# Altium PCB MYPCBeta.PcbDoc
Units mil, origin at the board's own origin, x right, y up, seen from the top; angles counter-clockwise.
Board outline 6000 x 4000 mil, 2 copper layers (Top Layer, Bottom Layer); 56 components, 75 nets, 228 pads, 33 vias.
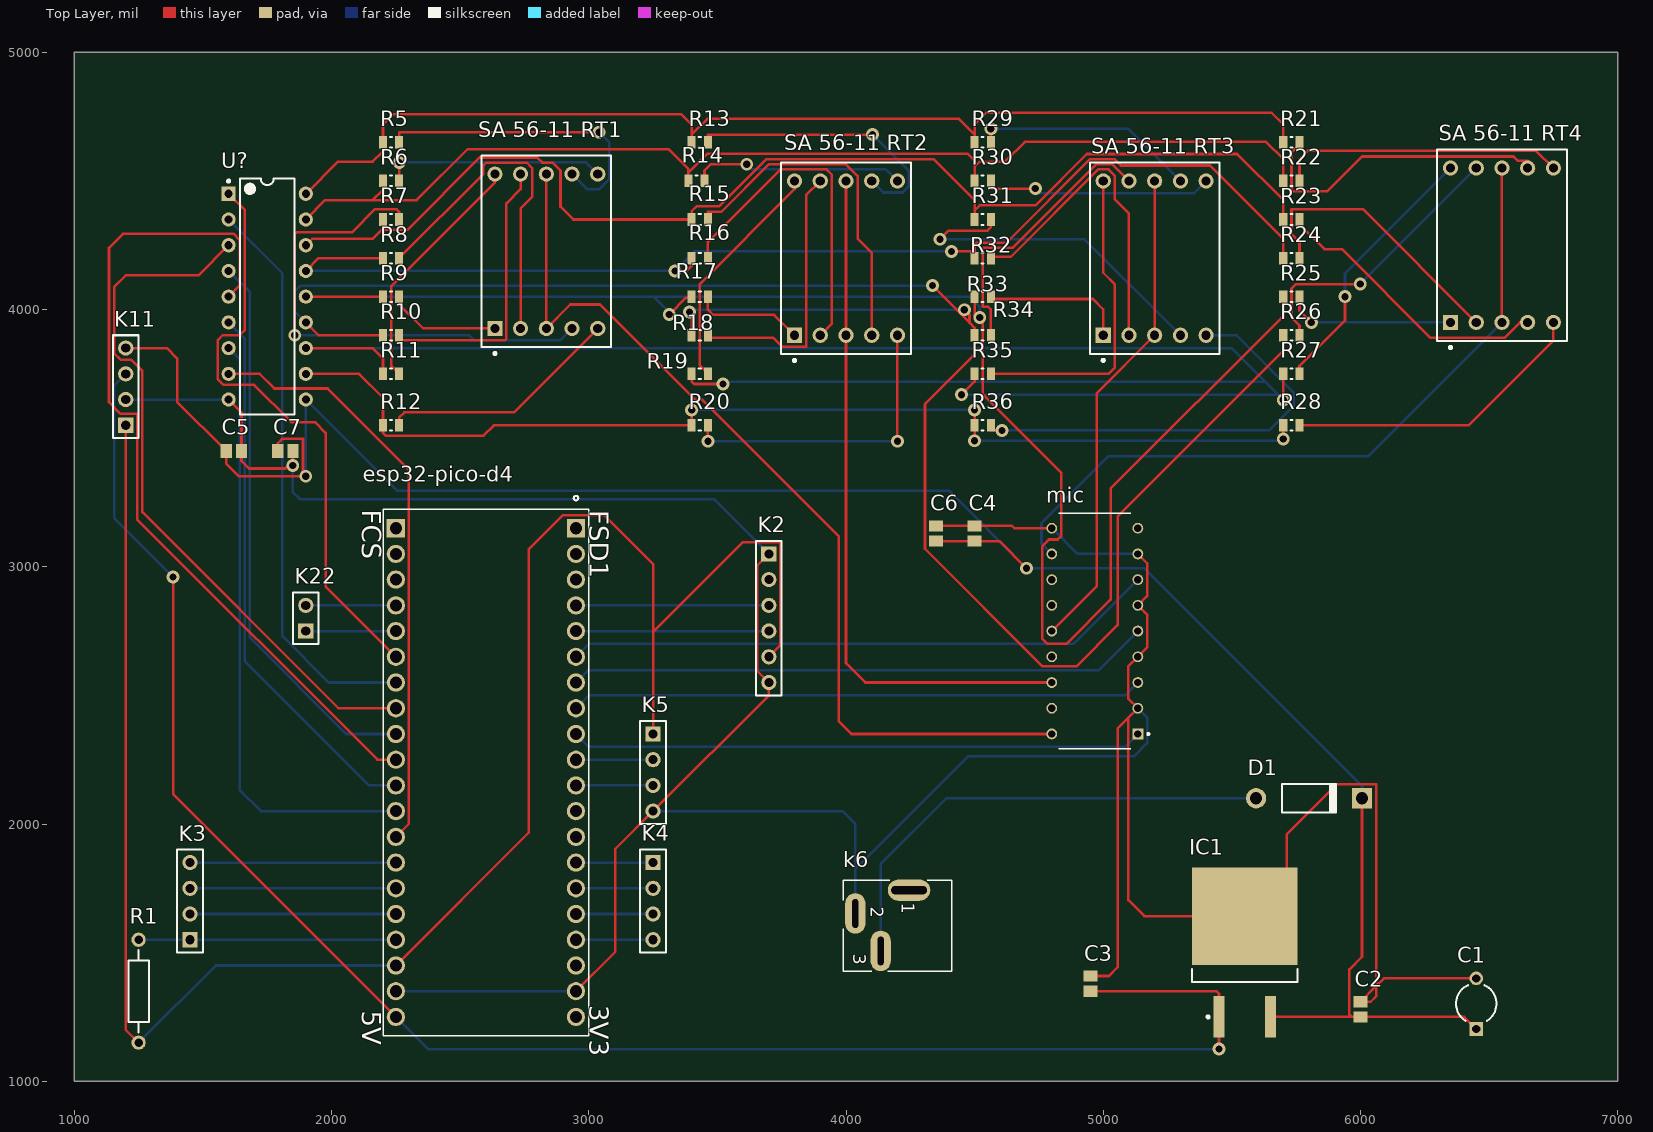
[diagram p0: Top Layer view]
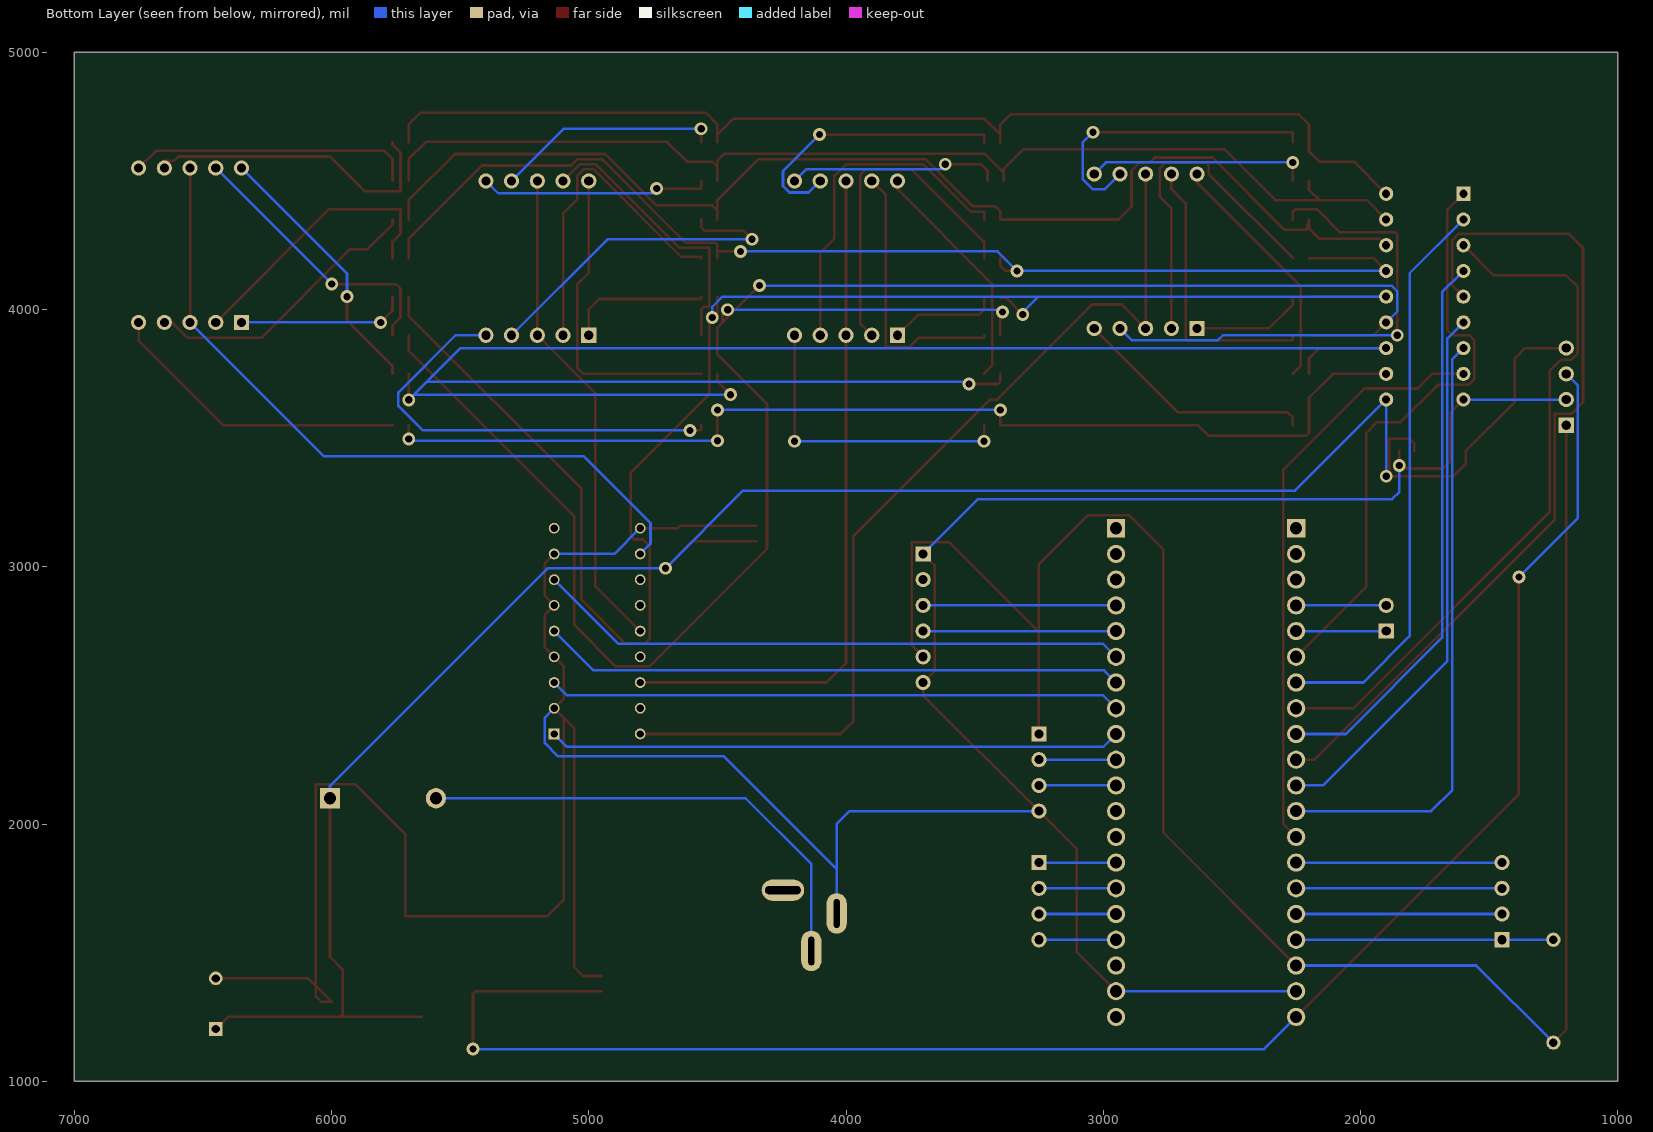
[diagram p1: Bottom Layer view, seen from below]

## Layer stack, top to bottom
Top Solder: solder mask 0.4, Solder Resist, Dk 3.5
Top Layer: signal copper 1.4
Dielectric 1: dielectric 12.6, FR-4, Dk 4.8
Bottom Layer: signal copper 1.4
Bottom Solder: solder mask 0.4, Solder Resist, Dk 3.5

## Board outline
1000,1000 7000,1000 7000,5000 1000,5000

## Design rules (kind name [scope] priority, off if disabled: settings)
Clearance [All] p1: gap=10 ignorepadtopadclearanceinfootprint=FALSE except(0: Arc-Hole Track-Hole SMDPad-Hole THPad-Hole Via-Hole Fill-Hole Poly-Hole Region-Hole Text-Hole)
PolygonConnect [All] p1: connectstyle=Relief reliefconductorwidth=10 reliefentries=4 polygonreliefangle="90 Angle" airgapwidth=10
RoutingVias [All] p1: holewidth=28 width=50 viastyle="Through Hole" minholewidth=28 minwidth=50 maxholewidth=28 maxwidth=50
SilkToSolderMaskClearance [IsPad] p1 off: minsilkscreentomaskgap=10 clearancetoexposedcopper=TRUE
SolderMaskExpansion [All] p1: expansion=4 istentingtop=FALSE
Width [All] p1: maxlimit=10 minlimit=10 preferedwidth=10
29 further rules are at their usual default settings.

## Components (designator, comment, footprint, x,y, rotation, side; value= is the part's Value field where it differs from the comment)
C1 "Cap Pol1" CAPR5-4X5 6450,1301.57 r90 top value=100μF
C2 "Cap Pol3" C0805 6000,1279.53 r90 top value=330nF
C3 "Cap Pol3" C0805 4950,1379.53 r90 top value=100nF
C4 "Cap Pol3" C0805 4500,3129.53 r90 top value=1μF
C5 "Cap Pol3" C0805 1620.47,3450 r0 top value=1μ
C6 "Cap Pol3" C0805 4350,3129.53 r90 top value=100nF
C7 "Cap Pol3" C0805 1820.47,3450 r0 top value=100nF
D1 "Diode" DO-41 5800,2100 r0 top
esp32-pico-d4 "esp32-pico-d4" esp32picod4 2580,2205 r270 top
IC1 "L7805CD2T-TR" TO-263_M 5550,1500 r90 top
K2 "Header 6" HDR1X6 3700,3050 r270 top
K3 "Header 4" HDR1X4 1450,1550 r90 top
K4 "Header 4" HDR1X4 3250,1850 r270 top
K5 "Header 4" HDR1X4 3250,2350 r270 top
k6 "k6" k6 4200,1600 r270 top
K11 "Header 4" HDR1X4 1200,3550 r90 top
K22 "Header 2" HDR1X2 1900,2750 r90 top
mic "MIC2981" MIC2981 4964.65,2765 r180 top
R1 "Res2" AXIAL-0.4 1250,1350 r90 top value=1K
R5 "Res2" smd43 2231.5,4650 r0 top value=43Ω
R6 "Res2" smd43 2231.5,4500 r0 top value=43Ω
R7 "Res2" smd43 2231.5,4350 r0 top value=43Ω
R8 "Res2" smd43 2231.5,4200 r0 top value=43Ω
R9 "Res2" smd43 2231.5,4050 r0 top value=43Ω
R10 "Res2" smd43 2231.5,3900 r0 top value=43Ω
R11 "Res2" smd43 2231.5,3750 r0 top value=43Ω
R12 "Res2" smd43 2231.5,3550 r0 top value=680Ω
R13 "Res2" smd43 3431.5,4650 r0 top value=43Ω
R14 "Res2" smd43 3418.5,4500 r0 top value=43Ω
R15 "Res2" smd43 3431.5,4350 r0 top value=43Ω
R16 "Res2" smd43 3431.5,4200 r0 top value=43Ω
R17 "Res2" smd43 3431.5,4050 r0 top value=43Ω
R18 "Res2" smd43 3431.5,3900 r0 top value=43Ω
R19 "Res2" smd43 3431.5,3750 r0 top value=43Ω
R20 "Res2" smd43 3431.5,3550 r0 top value=680Ω
R21 "Res2" smd43 5731.5,4650 r0 top value=43Ω
R22 "Res2" smd43 5731.5,4500 r0 top value=43Ω
R23 "Res2" smd43 5731.5,4350 r0 top value=43Ω
R24 "Res2" smd43 5731.5,4200 r0 top value=43Ω
R25 "Res2" smd43 5731.5,4050 r0 top value=43Ω
R26 "Res2" smd43 5731.5,3900 r0 top value=43Ω
R27 "Res2" smd43 5731.5,3750 r0 top value=43Ω
R28 "Res2" smd43 5731.5,3550 r0 top value=680Ω
R29 "Res2" smd43 4531.5,4650 r0 top value=43Ω
R30 "Res2" smd43 4531.5,4500 r0 top value=43Ω
R31 "Res2" smd43 4531.5,4350 r0 top value=43Ω
R32 "Res2" smd43 4531.5,4200 r0 top value=43Ω
R33 "Res2" smd43 4531.5,4050 r0 top value=43Ω
R34 "Res2" smd43 4531.5,3900 r0 top value=43Ω
R35 "Res2" smd43 4531.5,3750 r0 top value=43Ω
R36 "Res2" smd43 4531.5,3550 r0 top value=680Ω
"SA 56-11 RT1" "Dpy Blue-CA" H 2835,4226.5 r0 top
"SA 56-11 RT2" "Dpy Blue-CA" H 4000,4200 r0 top
"SA 56-11 RT3" "Dpy Blue-CA" H 5200,4200 r0 top
"SA 56-11 RT4" "Dpy Blue-CA" H 6550,4250 r0 top
U? "ULN2803A" STM-DIP-18 1750,4050 r0 top

## Footprints (in the part's own frame and the unit in brackets; to place one, negate y for a bottom-side part, rotate by r counter-clockwise, add the part's x,y. Pads: shape width x height; smd on the part's side, far side on the other; paste and mask are expansions set on the pad)
AXIAL-0.4 [mm] "Axial Device, Thru-Hole; 2 Leads; 0.4 in Pin Spacing"
  round 1.4 hole 0.85: 1(-5.08,0) 2(5.08,0)
  silkscreen extent -4.06,-1.02 4.06,1.02
C0805 [mm] "Chip Capacitor, Body 2.0x1.3mm, IPC High Density"
  rect 1.1x1.4 smd: 1(-0.75,0) 2(0.75,0)
  body extent -1.1,-0.72 1.1,0.72, height 1.4
CAPR5-4X5 [mm] "Capacitor; 2 Leads"
  rect 1.35x1.35 hole 0.8: 1(-2.5,0)
  round 1.35 hole 0.8: 2(2.5,0)
  silkscreen extent -1.69,-2 1.82,2
DO-41 [mm] "Diode, Axial; Body 5.2 x 2.7 mm (LxDia. max), Lead Dia. 0.86 mm (max)"
  round 2 hole 1.2: 1(-5.23,0)
  rect 2x2 hole 1.2: 2(5.23,0)
  silkscreen extent -2.65,-1.4 2.75,1.4
esp32picod4 [mm]
  rect 1.8x1.8 hole 1.2: 1(-24.003,-8.382) 40(-24.003,9.398)
  round 1.8 hole 1.2: 2(-21.463,-8.382) 3(-18.923,-8.382) 4(-16.383,-8.382) 5(-13.843,-8.382) 6(-11.303,-8.382) 7(-8.763,-8.382) 8(-6.223,-8.382) 9(-3.683,-8.382) 10(-1.143,-8.382) 11(1.397,-8.382) 12(3.937,-8.382) 13(6.477,-8.382) 14(9.017,-8.382) 15(11.557,-8.382) 16(14.097,-8.382) 17(16.637,-8.382) 18(19.177,-8.382) 19(21.717,-8.382) 20(24.257,-8.382) 21(24.257,9.398) 22(21.717,9.398) 23(19.177,9.398) 24(16.637,9.398) 25(14.097,9.398) 26(11.557,9.398) 27(9.017,9.398) 28(6.477,9.398) 29(3.937,9.398) 30(1.397,9.398) 31(-1.143,9.398) 32(-3.683,9.398) 33(-6.223,9.398) 34(-8.763,9.398) 35(-11.303,9.398) 36(-13.843,9.398) 37(-16.383,9.398) 38(-18.923,9.398) 39(-21.463,9.398)
  silkscreen extent -27.2,-9.64 26.13,10.66
H [mm] "LED, 7-Segment Display, 14.2 mm, RHD; 10 Leads; Row Space 15.24 mm; Pitch 2.54 mm"
  rect 1.5x1.5 hole 0.9: 1(-5.08,-7.62)
  round 1.5 hole 0.9: 2(-2.54,-7.62) 3(0,-7.62) 4(2.54,-7.62) 5(5.08,-7.62) 6(5.08,7.62) 7(2.54,7.62) 8(0,7.62) 9(-2.54,7.62) 10(-5.08,7.62)
  silkscreen extent -6.4,-10.22 6.4,9.45, body extent -6.4,-9.45 6.4,9.45, height 8.25
HDR1X2 [mm] "Connector; Header; 2 Position"
  rect 1.5x1.5 hole 0.9: 1(0,0)
  round 1.5 hole 0.9: 2(2.54,0)
  silkscreen extent -1.27,-1.27 3.81,1.27
HDR1X4 [mm] "Connector; Header; 4 Position"
  rect 1.5x1.5 hole 0.9: 1(0,0)
  round 1.5 hole 0.9: 2(2.54,0) 3(5.08,0) 4(7.62,0)
  silkscreen extent -1.27,-1.27 8.89,1.27
HDR1X6 [mm] "Connector; Header; 6 Position"
  rect 1.5x1.5 hole 0.9: 1(0,0)
  round 1.5 hole 0.9: 2(2.54,0) 3(5.08,0) 4(7.62,0) 5(10.16,0) 6(12.7,0)
  silkscreen extent -1.27,-1.27 13.97,1.27
k6 [mm]
  oval 2.1x4.2 hole 0.8 slot 3.52 at 90 deg: 1(-3.627,1.143)
  oval 4x2 hole 0.6 slot 2.82 at 0 deg: 2(-1.327,-4.157) 3(2.373,-1.657)
  silkscreen extent -4.63,-5.36 4.37,5.34
MIC2981 [mm]
  rect 1.07x1.07 hole 0.72: 1(-4.318,10.541)
  round 1.07 hole 0.72: 2(-4.318,8.001) 3(-4.318,5.461) 4(-4.318,2.921) 5(-4.318,0.381) 6(-4.318,-2.159) 7(-4.318,-4.699) 8(-4.318,-7.239) 9(-4.318,-9.779) 10(4.182,-9.779) 11(4.182,-7.239) 12(4.182,-4.699) 13(4.182,-2.159) 14(4.182,0.381) 15(4.182,2.921) 16(4.182,5.461) 17(4.182,8.001) 18(4.182,10.541)
  silkscreen extent -5.45,-11.24 3.48,12
smd43 [mm]
  rect 0.8x1.25 smd: 1(-0.8,0) 2(0.8,0)
  silkscreen extent -0.1,-0.53 0.1,0.53, body extent -1.05,-0.67 1.05,0.67, height 0.6
STM-DIP-18 [mm] "DIP, 18-Leads, Body 23.25x7.1mm, Pitch 2.54mm"
  rect 1.4x1.4 hole 0.8: 1(-3.81,10.16)
  round 1.4 hole 0.8: 2(-3.81,7.62) 3(-3.81,5.08) 4(-3.81,2.54) 5(-3.81,0) 6(-3.81,-2.54) 7(-3.81,-5.08) 8(-3.81,-7.62) 9(-3.81,-10.16) 10(3.81,-10.16) 11(3.81,-7.62) 12(3.81,-5.08) 13(3.81,-2.54) 14(3.81,0) 15(3.81,2.54) 16(3.81,5.08) 17(3.81,7.62) 18(3.81,10.16)
  silkscreen extent -3.93,-11.65 2.7,11.65, body extent -3.93,-11.63 3.93,11.63, height 3.93
TO-263_M [mm] "D2-PAK, 4-Leads, Body 9.2x10.2mm, Pitch 2.54mm, Lead Span 15.4mm, IPC Low Density"
  rect 4.1x1.05 smd: 1(-6.35,2.54) 3(-6.35,-2.54)
  rect 9.6x10.45 smd: 4(3.6,0)
  silkscreen extent -6.47,-5.2 -1.6,5.2, body extent -2.9,-5.2 6.45,5.2, height 4.6

## Part data
C1: "Polarized Capacitor (Radial)", LatestRevisionDate=17-Jul-2002, LatestRevisionNote="Re-released for DXP Platform.", PackageDescription="Polarized Capacitor (Radial); 2 Leads", PackageReference=RB7.6-15, Published=8-Jun-2000, Publisher="Altium Limited"
C2 C3 C4 C5 C6 C7: "Polarized Capacitor (Surface Mount)", LatestRevisionDate=29-May-2009, LatestRevisionNote="IPC-7351 Footprint Added.", PackageDescription="Chip Capacitor", PackageReference=C0805, Published=8-Jun-2000, Publisher="Altium Limited"
D1: library part "Diode 1N4002", "1 Amp General Purpose Rectifier", Code_JEDEC=DO-204-AL, ComponentLink1Description="Manufacturer Link", ComponentLink1URL=http://www.fairchildsemi.com/, ComponentLink2Description=Datasheet, ComponentLink2URL=http://www.fairchildsemi.com/ds/1N%2F1N4001.pdf, DatasheetVersion=1998, LatestRevisionDate=17-Jul-2002, LatestRevisionNote="Re-released for DXP Platform.", PackageDescription="Diode, Axial; Body 5.2 x 2.7 mm (LxDia. max), Lead Dia. 0.86 mm (max)", PackageReference=DO-41, PackageVersion=Aug-1999, Published=8-Jun-2000, Publisher="Altium Limited"
esp32-pico-d4: library part "picoESP32-PICO-KIT V"
IC1: library part CMP-0244-00213-1, "Positive Voltage Regulator, 3-Pin D2PAK, Tape and Reel", ComponentLink1Description="Manufacturer URL", ComponentLink1URL=http://www.st.com, ComponentLink2Description=Datasheet, ComponentLink2URL=http://www.st.com/internet/com/TECHNICAL_RESOURCES/TECHNICAL_LITERATURE/DATASHEET/CD00000444.pdf, DatasheetVersion=16/11/2011, PackageDescription="3-Pin Transistor Outline Package 2.54 mm Pitch, 15.4 mm Lead Span (D2PAK)", PackageReference=TO-263, PackageVersion=2011
K2: "Header, 6-Pin", LatestRevisionDate=17-Jul-2002, LatestRevisionNote="Re-released for DXP Platform.", Publisher="Altium Limited"
K3 K4 K5 K11: "Header, 4-Pin", LatestRevisionDate=17-Jul-2002, LatestRevisionNote="Re-released for DXP Platform.", Publisher="Altium Limited"
K22: "Header, 2-Pin", LatestRevisionDate=17-Jul-2002, LatestRevisionNote="Re-released for DXP Platform.", Publisher="Altium Limited"
R1 R5 R6 R7 R8 R9 R10 R11 R12 R13 R14 R15 R16 R17 R18 R19 R20 R21 R22 R23 R24 R25 R26 R27 R28 R29 R30 R31 R32 R33 R34 R35 R36: "Resistor", LatestRevisionDate=17-Jul-2002, LatestRevisionNote="Re-released for DXP Platform.", PackageDescription="Axial Device, Thru-Hole; 2 Leads; 0.4 in Pin Spacing", PackageReference=AXIAL-0.4, Published=8-Jun-2000, Publisher="Altium Limited"
"SA 56-11 RT1": "14.2 mm General Purpose Blue 7-Segment Display: CA, RH DP, Gray Surface", Colour=Blue, ComponentLink1Description="Manufacturer Link", ComponentLink1URL=http://www.agilent.com/, DatasheetVersion=24-Sep-2002, LatestRevisionDate=17-Dec-2003, LatestRevisionNote="Schematic revised, PCB Footprint replaced.", MinimumIntensity="2020 ucd", Note="IF = 10 mA", PackageDescription="LED, 7-Segment Display, 14.2 mm, RHD; 10 Leads; Row Space 15.24 mm; Pitch 2.54 mm", PackageReference=H, PackageVersion=24-Sep-2002, Published=8-Jun-2000, Publisher="Altium Limited"
"SA 56-11 RT2" "SA 56-11 RT3" "SA 56-11 RT4": "14.2 mm General Purpose Blue 7-Segment Display: CA, RH DP, Gray Surface", Colour=red, ComponentLink1Description="Manufacturer Link", ComponentLink1URL=http://www.agilent.com/, DatasheetVersion=24-Sep-2002, LatestRevisionDate=17-Dec-2003, LatestRevisionNote="Schematic revised, PCB Footprint replaced.", MinimumIntensity="2020 ucd", Note="IF = 10 mA", PackageDescription="LED, 7-Segment Display, 14.2 mm, RHD; 10 Leads; Row Space 15.24 mm; Pitch 2.54 mm", PackageReference=H, PackageVersion=24-Sep-2002, Published=8-Jun-2000, Publisher="Altium Limited"
U?: library part CMP-2000-05363-1, "Eight Darlington Arrays, 50 V, 2.25 W, 500 mA, 18-Pin DIP, RoHS, Tube", Collector Emitter Voltage V(br)ceo=50V, DC Collector Current=500mA, DC Current Gain hFE=1000hFE, Manufacturer=STMicroelectronics, Operating Temperature Max=85degC, Package Description="18-Pin Double In-line Package, Body 24.8 x 7.1 mm, Pitch 2.54 mm", Package Reference=DIP-18, Power Dissipation Pd=2.25W, Transistor Case Style=DIP, Automotive Qualification Standard=-, Datasheet URL=https://datasheet.ciiva.com/29306/171824-da-01-en-ic-uln2803-dil18-29306026.pdf, Datasheet Version=Sep-03, Manufacturer URL=http://www.st.com/, MSL=-, No. of Pins=18Pins, Product Range=-, SVHC=NoSVHC(17-Dec-2015), Transistor Polarity=NPN

## Via types
v1: diameter 50, hole 28, Top Layer to Bottom Layer, 33 vias

## Nets (pads, with @x,y where several pads share a name; then routed paths per layer and width w, separated by ;. In a path a pad name is that pad's centre, name@x,y a point inside that pad or via, vN(x,y) a via of type N, cw(c..) or ccw(c..) an arc to the next point about the centre after c; other vN are vias at no path point)
+3.3: esp32-pico-d4.18 K2.5 K5.1 K11.1 R1.1 | length 7757.7
  Top Layer w10: K11.1 1200,1200 R1.1 ; esp32-pico-d4.18 2766,1966 2766,3068 2899,3201 3059,3201 3250,3010 3250,2747 ; K5.1 3250,2747 ; K2.5 3745,2695 3745,3095 3598,3095 3250,2747
  Bottom Layer w10: R1.1 1550,1450 esp32-pico-d4.18
+5: C3.1 esp32-pico-d4.20 IC1.1 K11.3 | length 6943.1
  Top Layer w10: v1(1384,2960) 1384,2116 esp32-pico-d4.20 ; C3.1 5440,1350 5450,1340 IC1.1 v1(5450,1125)
  Bottom Layer w10: K11.3 1155,3705 1155,3189 v1(1384,2960) ; esp32-pico-d4.20 2375,1125 v1(5450,1125)
+12: C1.1 C2.1 C4.1 C5.1 C6.1 C7.1 D1.2 IC1.3 K11.4 U?.10 | length 8480.1
  Top Layer w10: K11.4 1360,3850 1400,3810 1400,3640.94 C5.1 1590.94,3400 1638.94,3352 v1@1889.2,3352 ; C7.1 1790.94,3480 1808.94,3498 1889.2,3498 v1@1889.2,3352 ; v1(1900,3352) v1@1889.2,3352 ; C6.1 C4.1 4596,3100 v1(4702,2994) ; IC1.3 5967,1250 ; D1.2 6005.91,1483.91 5957,1435 5957,1260 5967,1250 ; C1.1 6403.15,1250 C2.1 5967,1250
  Bottom Layer w10: v1(1900,3352) U?.10 2254,3296 4400,3296 v1(4702,2994) 5160,2994 6005.91,2148.09 D1.2
+VIN: D1.1 k6.3 | length 1903.4
  Bottom Layer w10: k6.3 4134.76,1845 4389.76,2100 D1.1
GND: C1.2 C2.2 C3.2 C4.2 C5.2 C6.2 C7.2 esp32-pico-d4.19 esp32-pico-d4.22 IC1.4 K2.1 K2.6 K5.4 k6.2 K11.2 mic.2 mic.4 mic.6 mic.8 mic.10 U?.9 | length 14543.8
  Top Layer w10: U?.9 1650,3600 C5.2 1650,3412 1680,3382 1820,3382 v1@1850,3412 ; v1(1849,3394) 1850,3395 v1@1850,3412 ; C7.2 v1@1850,3412 ; esp32-pico-d4.22 3103,1503 3103,1903 K5.4 3700,2500 K2.6 3655,2595 3655,3005 K2.1 ; C6.2 C4.2 4645,3159.06 4654.06,3150 mic.10 ; C3.2 5022,1409.06 5056,1443.06 5056,2371.35 5098,2413.35 ; mic.8 5171,3013.65 5171,2886.35 mic.6 5171,2813.65 5171,2686.35 mic.4 5098,2613.35 5098,2486.65 mic.2 5098,2413.35 ; C1.2 6090.94,1400 6061,1370.06 ; 5098,2413.35 5098,1703.73 5160,1641.73 IC1.4 5713,1641.73 5713,1959 5909,2155 6061,2155 6061,1370.06 ; 6061,1370.06 C2.2 6040,1309.06 6061,1330.06 6061,1370.06
  Bottom Layer w10: K11.2 U?.9 ; v1(1849,3394) 1849,3291 1877,3263 3487,3263 K2.1 ; esp32-pico-d4.19 esp32-pico-d4.22 ; K5.4 3986.34,2050 4036.34,2000 4036.34,1825.34 ; k6.2 4036.34,1825.34 ; mic.10 4900,3050 mic.8 ; mic.2 5171,2413.65 5171,2314 5120,2263 4474,2263 4036.34,1825.34
I1: esp32-pico-d4.6 U?.1 | length 2318.7
  Top Layer w10: U?.1 1663,4387 1663,3920 1643,3900 1577,3900 1557,3880 1557,3730 1580,3707 1699,3707 1844,3562 1935,3562 1977,3520 1977,2923 esp32-pico-d4.6
I2: esp32-pico-d4.7 U?.2 | length 2222.1
  Bottom Layer w10: U?.2 1809,4141 1809,2730 1989,2550 esp32-pico-d4.7
I3: esp32-pico-d4.8 U?.3 | length 2757.9
  Top Layer w10: U?.3 1483,4133 1200,4133 1155,4088 1155,3830 1180,3805 1220,3805 1264.53,3760.47 1264.53,3212.23 2026.76,2450 esp32-pico-d4.8
I4: esp32-pico-d4.9 U?.4 | length 2182.3
  Bottom Layer w10: U?.4 1682.56,4067.44 1682.56,2724.44 2057,2350 esp32-pico-d4.9
I5: esp32-pico-d4.10 U?.5 | length 3310.4
  Top Layer w10: U?.5 1643,4093 1643,4271 1620,4294 1189,4294 1135,4240 1135,3640 1180.47,3594.53 1244.53,3594.53 1244.53,3183.3 2177.83,2250 esp32-pico-d4.10
I6: esp32-pico-d4.11 U?.6 | length 2130.2
  Bottom Layer w10: U?.6 1662.56,3887.44 1662.56,2633.44 2146,2150 esp32-pico-d4.11
I7: esp32-pico-d4.12 U?.7 | length 2376.8
  Bottom Layer w10: U?.7 1642.56,3807.44 1642.56,2132.44 1725,2050 esp32-pico-d4.12
I8: esp32-pico-d4.13 U?.8 | length 2303.6
  Top Layer w10: U?.8 1721,3750 1778,3693 1985,3693 2301,3377 2301,2001 esp32-pico-d4.13
Netesp32-pico-d4_4: esp32-pico-d4.4 K22.2 | length 350
  Bottom Layer w10: K22.2 esp32-pico-d4.4
Netesp32-pico-d4_5: esp32-pico-d4.5 K22.1 | length 350
  Bottom Layer w10: K22.1 esp32-pico-d4.5
Netesp32-pico-d4_14: esp32-pico-d4.14 K3.4 | length 800
  Bottom Layer w10: K3.4 esp32-pico-d4.14
Netesp32-pico-d4_15: esp32-pico-d4.15 K3.3 | length 800
  Bottom Layer w10: K3.3 esp32-pico-d4.15
Netesp32-pico-d4_16: esp32-pico-d4.16 K3.2 | length 800
  Bottom Layer w10: K3.2 esp32-pico-d4.16
Netesp32-pico-d4_17: esp32-pico-d4.17 K3.1 R1.2 | length 1000
  Bottom Layer w10: R1.2 K3.1 esp32-pico-d4.17
Netesp32-pico-d4_24: esp32-pico-d4.24 K4.4 | length 300
  Bottom Layer w10: esp32-pico-d4.24 K4.4
Netesp32-pico-d4_25: esp32-pico-d4.25 K4.3 | length 300
  Bottom Layer w10: esp32-pico-d4.25 K4.3
Netesp32-pico-d4_26: esp32-pico-d4.26 K4.2 | length 300
  Bottom Layer w10: esp32-pico-d4.26 K4.2
Netesp32-pico-d4_27: esp32-pico-d4.27 K4.1 | length 300
  Bottom Layer w10: esp32-pico-d4.27 K4.1
Netesp32-pico-d4_30: esp32-pico-d4.30 K5.3 | length 300
  Bottom Layer w10: esp32-pico-d4.30 K5.3
Netesp32-pico-d4_31: esp32-pico-d4.31 K5.2 | length 300
  Bottom Layer w10: esp32-pico-d4.31 K5.2
Netesp32-pico-d4_32: esp32-pico-d4.32 mic.1 | length 2226.1
  Bottom Layer w10: esp32-pico-d4.32 3000,2300 5084.65,2300 mic.1
Netesp32-pico-d4_33: esp32-pico-d4.33 mic.3 | length 2226.1
  Bottom Layer w10: esp32-pico-d4.33 3000,2500 5084.65,2500 mic.3
Netesp32-pico-d4_34: esp32-pico-d4.34 mic.5 | length 2267.5
  Bottom Layer w10: esp32-pico-d4.34 2997,2597 4981.65,2597 mic.5
Netesp32-pico-d4_35: esp32-pico-d4.35 mic.7 | length 2308.9
  Bottom Layer w10: esp32-pico-d4.35 3000,2700 4884.65,2700 mic.7
Netesp32-pico-d4_36: esp32-pico-d4.36 K2.4 | length 750
  Bottom Layer w10: esp32-pico-d4.36 K2.4
Netesp32-pico-d4_37: esp32-pico-d4.37 K2.3 | length 750
  Bottom Layer w10: esp32-pico-d4.37 K2.3
Netmic_11: "SA 56-11 RT4.3" "SA 56-11 RT4.8" mic.11 | length 2849.7
  Top Layer w10: 6550,3950 6550,4550
  Bottom Layer w10: mic.11 4760,3090 4760,3170 5019,3429 6029,3429 6550,3950
Netmic_14: "SA 56-11 RT3.3" "SA 56-11 RT3.8" mic.14 | length 1915.7
  Top Layer w10: mic.14 4975,2925 4975,3675 5200,3900 5200,4500
Netmic_16: "SA 56-11 RT2.3" "SA 56-11 RT2.8" mic.16 | length 2706.1
  Top Layer w10: 4000,4500 4000,3900 4000,2625 4075,2550 mic.16
Netmic_18: "SA 56-11 RT1.3" "SA 56-11 RT1.8" mic.18 | length 3716.2
  Top Layer w10: 2835,4526.5 2835,3926.5 2928.01,4019.5 3043.5,4019.5 3413,3650 3440,3650 3971,3119 3971,2400 4021,2350 mic.18
O1: R5.1 R13.1 R21.1 R29.1 U?.18 | length 4302.4
  Top Layer w10: U?.18 2025,4575 2160,4575 2200,4615 R5.1 2200,4719 2240,4759 3360,4759 3400,4719 3400,4680 ; R13.1 3400,4680 ; R29.1 4500,4680 ; R21.1 5700,4720 5655,4765 4545,4765 4500,4720 4500,4680 ; 3400,4680 3461.16,4741.16 4438.84,4741.16 4500,4680
O2: R6.1 R14.1 R22.1 R30.1 U?.17 | length 4356.1
  Top Layer w10: U?.17 1975,4425 2160,4425 ; R6.1 2200,4465 2160,4425 ; R14.1 3387.01,4532.01 ; R30.1 4500,4555 ; R22.1 5700,4584.53 5632.53,4652 4696,4652 4619,4575 4520,4575 4500,4555 ; 2160,4425 2331,4425 2529.56,4623.56 3310.44,4623.56 3387.01,4546.99 3387.01,4532.01 ; 3387.01,4532.01 3460,4605 4473.73,4605 4500,4578.73 4500,4555
O3: R7.1 R15.1 R23.1 R31.1 U?.16 | length 4688.7
  Top Layer w10: U?.16 1925,4275 2160,4275 2200,4315 R7.1 2210,4310 2294.77,4310 2575.79,4591.02 2799.53,4591.02 2819.53,4571.02 2858.98,4571.02 2890,4540 2890,4400 2940,4350 R15.1 3400,4382 3420,4402 3508,4402 3690.53,4584.53 4340.47,4584.53 4500,4425 4500,4385 ; R31.1 4500,4385 ; R23.1 5700,4425 5520.47,4604.53 4935.89,4604.53 4736.37,4405 4520,4405 4500,4385
O4: R8.1 R16.1 R24.1 R32.1 U?.15 | length 4648.8
  Top Layer w10: U?.15 1950,4200 R8.1 ; v1(3335,4150) 3380,4150 3400,4170 R16.1 ; v1(4410,4226) 4500,4226 ; R32.1 4500,4226 ; R24.1 5700,4275 5415,4560 5068.76,4560 5044.23,4584.53 4948.52,4584.53 4623.6,4259.61 4506.91,4259.61 4500,4252.69 4500,4226
  Bottom Layer w10: U?.15 v1(3335,4150) 3411,4226 v1(4410,4226)
O5: R9.1 R17.1 R25.1 R33.1 U?.14 | length 6535.4
  Top Layer w10: U?.14 R9.1 ; v1(3313,3981) 3378.39,4046.39 3400,4046.39 R17.1 ; R33.1 v1@4500,3975 ; v1(4520,3969) v1@4500,3975 ; R25.1 5700,3975 5029,3304 5029,2872 4857,2700 4783,2700 4763,2720 4763,3080 4789,3106 4823,3106 4837,3120 4837,3364 4532,3669 4532,3943 v1@4500,3975
  Bottom Layer w10: U?.14 3252,4050 ; v1(3313,3981) 3317,3985 3252,4050 ; v1(4520,3969) 4520,4010 4480,4050 3252,4050
O6: R10.1 R18.1 R26.1 R34.1 U?.13 | length 7739.6
  Top Layer w10: U?.13 1950,3900 R10.1 ; v1(3392,3990) 3400,3982 R18.1 ; v1(4336,4093) 4480,3949 ; v1(4460,3999) 4480,3979 4480,3949 ; R26.1 5700,3840 5056,3196 5056,2773 4896,2613 4764,2613 4307,3070 4307,3632 4500,3825 R34.1 4500,3929 4480,3949
  Bottom Layer w10: U?.13 1857,3993 1857,4070 1880,4093 v1(4336,4093) ; v1(3392,3990) 3401,3999 v1(4460,3999)
O7: R11.1 R19.1 R27.1 R35.1 U?.12 | length 7960.7
  Top Layer w10: U?.12 2160,3850 2200,3810 R11.1 ; R19.1 3400,3720.39 3410,3710.39 v1(3521.39,3710.39) ; v1(4449,3669) 4500,3720 R35.1 ; v1(5700,3649) R27.1
  Bottom Layer w10: U?.12 5499,3850 5629,3720 ; v1(3521.39,3710.39) 3531,3720 5629,3720 ; v1(4449,3669) 5680,3669 ; v1(5700,3649) 5680,3669 ; 5629,3720 5680,3669
O8: R12.1 R20.1 R28.1 R36.1 U?.11 | length 4232.6
  Top Layer w10: U?.11 2107,3750 2200,3657 R12.1 2200,3520 2210,3510 2591,3510 2631,3550 R20.1 v1(3400,3610) ; v1(4500,3489.65) R36.1 v1(4500,3610) ; v1(5700,3497) R28.1
  Bottom Layer w10: v1(3400,3610) v1(4500,3610) ; v1(4500,3489.65) 5692.65,3489.65 v1(5700,3497)
R5: "SA 56-11 RT1.7" R5.2 | length 1200.8
  Top Layer w10: R5.2 2262.99,4689 v1(3040,4689)
  Bottom Layer w10: 2935,4526.5 2994.5,4467 3040,4467 3080,4507 3080,4649 v1(3040,4689)
R6: "SA 56-11 RT1.6" R6.2 | length 862.9
  Top Layer w10: R6.2 v1(2262.99,4572)
  Bottom Layer w10: v1(2262.99,4572) 2989.5,4572 3035,4526.5
R7: "SA 56-11 RT1.4" R7.2 | length 1978
  Top Layer w10: v1(1857,3900) 1857,4293 1864,4300 2079,4300 2169,4390 2252.99,4390 2262.99,4380 R7.2
  Bottom Layer w10: v1(1857,3900) 2535,3900 2554,3881 2889.5,3881 2935,3926.5
R8: "SA 56-11 RT1.2" R8.2 | length 1340.6
  Top Layer w10: R8.2 2590.47,4527.48 2590.47,4560 2601.5,4571.02 2758.98,4571.02 2780,4550 2780,4438 2735,4393 2735,3926.5
R9: "SA 56-11 RT1.1" R9.2 | length 440.7
  Top Layer w10: R9.2 2262.99,4020 2356.5,3926.5 2635,3926.5
R10: "SA 56-11 RT1.9" R10.2 | length 1101.4
  Top Layer w10: R10.2 2262.99,3881 2675,3881 2680,3886 2680,4413 2735,4468 2735,4526.5
R11: "SA 56-11 RT1.10" R11.2 | length 956.3
  Top Layer w10: R11.2 2262.99,3751.98 2232,3782.98 2232,4090 2635,4493 2635,4526.5
R12: "SA 56-11 RT1.5" R12.2 | length 945.5
  Top Layer w10: R12.2 2262.99,3580 2282.99,3600 2708.5,3600 3035,3926.5
R13: "SA 56-11 RT2.7" R13.2 | length 1102.8
  Top Layer w10: R13.2 3462.99,4680 v1(4103,4680)
  Bottom Layer w10: 4100,4500 4145,4455 4220,4455 4245,4480 4245,4538 v1(4103,4680)
R14: "SA 56-11 RT2.6" R14.2 | length 827.3
  Top Layer w10: R14.2 3450,4540 3475,4565 v1(3614,4565)
  Bottom Layer w10: v1(3614,4565) 3634,4545 4155,4545 4200,4500
R15: "SA 56-11 RT2.4" R15.2 | length 1349.7
  Top Layer w10: R15.2 3462.99,4380 3515,4380 3699.53,4564.53 4000.47,4564.53 4045,4520 4045,4276 4100,4221 4100,3900
R16: "SA 56-11 RT2.2" R16.2 | length 1312.8
  Top Layer w10: R16.2 3462.99,4263 3744.52,4544.53 3924.47,4544.53 3945,4524 3945,3945 3900,3900
R17: "SA 56-11 RT2.1" R17.2 | length 428.4
  Top Layer w10: R17.2 3462.99,4000 3483.99,3979 3721,3979 3800,3900
R18: "SA 56-11 RT2.9" R18.2 | length 1073.7
  Top Layer w10: R18.2 3462.99,3891 3717,3891 3753,3855 3845,3855 3845,4445 3900,4500
R19: "SA 56-11 RT2.10" R19.2 | length 915.3
  Top Layer w10: R19.2 3462.99,3751.98 3432,3782.98 3432,4100 3800,4468 3800,4500
R20: "SA 56-11 RT2.5" R20.2 | length 1211
  Top Layer w10: v1(3462.99,3488) R20.2 ; v1(4200,3488) 4200,3900
  Bottom Layer w10: v1(3462.99,3488) v1(4200,3488)
R21: "SA 56-11 RT4.7" R21.2 | length 1212.4
  Top Layer w10: R21.2 5762.99,4641 5732,4610.01 5732,4460 5871,4460 6006,4595 6595,4595 6611,4579 6650,4579 6650,4550
R22: "SA 56-11 RT4.6" R22.2 | length 1113.6
  Top Layer w10: R22.2 5762.99,4586 5793.99,4617 6683,4617 6750,4550
R23: "SA 56-11 RT4.4" R23.2 | length 1113.5
  Top Layer w10: R23.2 5762.99,4331 5859.56,4234.43 5928.71,4234.43 6273.14,3890 6560,3890 6620,3950 6650,3950
R24: "SA 56-11 RT4.2" R24.2 | length 1103.1
  Top Layer w10: R24.2 5762.99,4263 5732,4293.99 5732,4390 6010,4390 6450,3950
R25: "SA 56-11 RT4.1" R25.2 | length 660.1
  Top Layer w10: R25.2 5762.99,3996.01 v1(5809,3950)
  Bottom Layer w10: v1(5809,3950) 6350,3950
R26: "SA 56-11 RT4.9" R26.2 | length 1106.1
  Top Layer w10: R26.2 5762.99,3938 5732,3968.99 5732,4081 5750,4099 v1(5999,4099)
  Bottom Layer w10: v1(5999,4099) 6450,4550
R27: "SA 56-11 RT4.10" R27.2 | length 1043.1
  Top Layer w10: R27.2 5762.99,3780.99 5940,3958 v1(5940,4050)
  Bottom Layer w10: v1(5940,4050) 5940,4140 6350,4550
R28: "SA 56-11 RT4.5" R28.2 | length 1193.7
  Top Layer w10: R28.2 6420,3550 6750,3880 6750,3950
R29: "SA 56-11 RT3.7" R29.2 | length 874.1
  Top Layer w10: R29.2 v1(4562.99,4703)
  Bottom Layer w10: v1(4562.99,4703) 5097,4703 5300,4500
R30: "SA 56-11 RT3.6" R30.2 | length 894.3
  Top Layer w10: R30.2 4562.99,4470 v1(4736,4470)
  Bottom Layer w10: v1(4736,4470) 4754,4452 5352,4452 5400,4500
R31: "SA 56-11 RT3.4" R31.2 | length 1337
  Top Layer w10: v1(4365,4273) 4398.99,4306.99 4550,4306.99 4562.99,4319.98 R31.2
  Bottom Layer w10: v1(4365,4273) 4927,4273 5300,3900
R32: "SA 56-11 RT3.2" R32.2 | length 1280.6
  Top Layer w10: R32.2 4562.99,4205 4640.47,4205 4980,4544.53 5020.47,4544.53 5045,4520 5045,4428 5100,4373 5100,3900
R33: "SA 56-11 RT3.1" R33.2 | length 563.6
  Top Layer w10: R33.2 4562.99,4041 4960,4041 5000,4001 5000,3900
R34: "SA 56-11 RT3.9" R34.2 | length 1094.1
  Top Layer w10: R34.2 4562.99,4000 4552.99,4010 4532,4010 4532,4239.61 4646.61,4239.61 4971.53,4564.53 5035.47,4564.53 5100,4500
R35: "SA 56-11 RT3.10" R35.2 | length 1236
  Top Layer w10: R35.2 5020,3750 5045,3775 5045,4098 5000,4143 5000,4500
R36: "SA 56-11 RT3.5" R36.2 | length 1721.3
  Top Layer w10: R36.2 4562.99,3530 v1(4607,3530)
  Bottom Layer w10: v1(4607,3530) 5645,3530 5740,3625 5740,3678 5518,3900 5400,3900
pads on no net: esp32-pico-d4.1 esp32-pico-d4.2 esp32-pico-d4.3 esp32-pico-d4.21 esp32-pico-d4.23 esp32-pico-d4.28 esp32-pico-d4.29 esp32-pico-d4.38 esp32-pico-d4.39 esp32-pico-d4.40 K2.2 k6.1 mic.9 mic.12 mic.13 mic.15 mic.17

## Text inside footprints (layer, text, board x,y; h text height)
esp32-pico-d4: Top Overlay "3V3" at 3003.78,1294.48 h73.82 r270; Top Overlay "FSD1" at 3003.76,3220.53 h73.82 r270; Top Overlay "5V" at 2119.93,1274.55 h73.82 r270; Top Overlay "FCS" at 2119.57,3221.28 h73.82 r270
k6: Top Overlay "1" at 4215.87,1693.58 h50 r270; Top Overlay "3" at 4028.86,1495.55 h50 r270; Top Overlay "2" at 4096.57,1678.62 h50 r270